# EAGLE board carte_bouton (EAGLE 6.5.0)
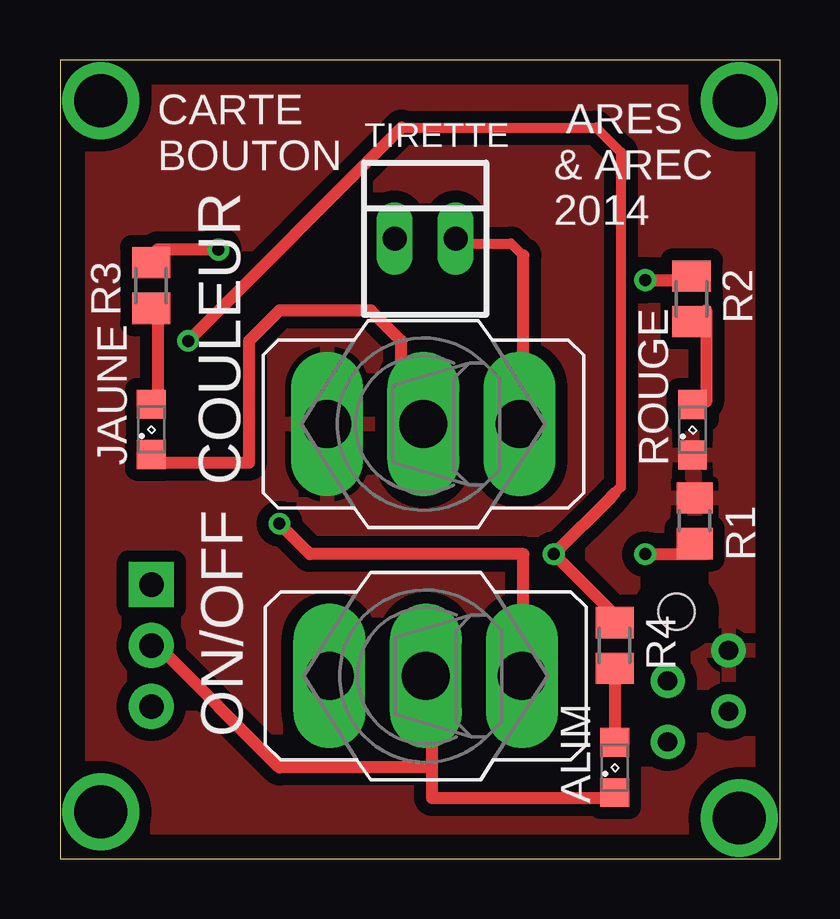
[diagram p0: board, top side]
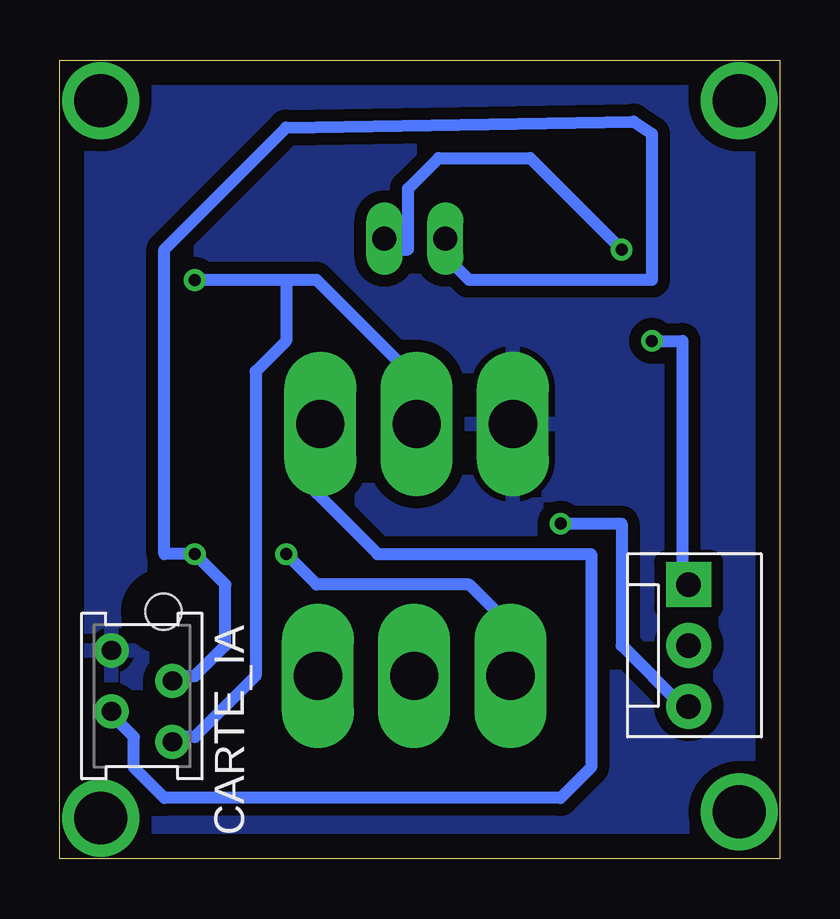
[diagram p1: board, bottom side, seen from below]

Size 30 x 33.3 mm. Coordinates in mm from the lower left corner, seen from the top.
Outline: 0,0 30,0 30,33.3 0,33.3 0,0
Copper layers (1*16): Top 0.1mm / dielectric 1.5mm / Bottom 0.1mm
Design rules "ensea": minimum track width 0.5mm, minimum drill 0.5mm, track to track 0.5mm, track to pad 0.5mm, pad to pad 0.5mm, via to via 0.5mm, smd to smd 8mil, copper to edge 40mil, drill to drill 8mil, minimum pad ring 10mil, minimum via ring 8mil, stop-mask expansion 4mil, vias tented up to drill 0mil, thermal gap 10mil

## Footprints (pad centres in the part's own frame; a part is rotated, then mirrored left to right if it is on the bottom)
SML0805 = smd 1.2 x 1.2: A 1.05,0; C -1.05,0
MOLEX-1X3 = drill 1.016 pad 1.88 square: 1 0,0 | drill 1.016 pad 1.88: 2 2.54,0; 3 5.08,0
AMP-215079-4 = drill 0.8 pad 1.422: 1 0,0; 2 1.27,2.54; 3 2.54,0; 4 3.81,2.54 | hole 1.5: -1.62,2.175
320-916 = drill 2.007 long: 1 0,4.013; 2 0,0; 3 0,-4.013
R0805 = smd 1.3 x 1.5: 1 -0.95,0; 2 0.95,0
M0805 = smd 1.3 x 1.6: 1 -0.95,0; 2 0.95,0
22-23-2021 = drill 1 long: 1 -1.27,0; 2 1.27,0

## Placement (x,y rotation side)
ALIM  [SML0805]  23.11,3.81 90 top
CARTE_ALIM  [MOLEX-1X3]  3.81,11.43 270 bottom
CARTE_IA  MMATCH-4-  [AMP-215079-4]  27.86,8.69 270 bottom
COULEUR  [320-916]  15.14,18.12 90 top
JAUNE  [SML0805]  3.8,17.9 90 top
ON/OFF  [320-916]  15.24,7.62 90 top
R1  [R0805]  26.44,14.09 270 top
R2  1k  [M0805]  26.32,23.34 270 top
R3  1k  [M0805]  3.8,23.9 90 top
R4  1k  [M0805]  23.11,8.89 270 top
ROUGE  [SML0805]  26.35,17.88 90 top
TIRETTE  22-23-2021  [22-23-2021]  15.21,25.85 0 top

## Library data of the parts
ALIM JAUNE ROUGE = led
CARTE_ALIM = SparkFun-Connectors
CARTE_IA = jt-con-micromatch
COULEUR ON/OFF = switch
R1-R4 = rcl
TIRETTE = con-molex; MF: MOLEX; MPN: 22-23-2021; OC_FARNELL: 1462926; OC_NEWARK: 25C3832

## Nets
5V: CARTE_ALIM.3 ON/OFF.3
+3V3: CARTE_IA.3 COULEUR.3 R3.2 TIRETTE.2
DATA_SWITCH: ALIM.C CARTE_ALIM.2 ON/OFF.2
GND: CARTE_IA.1 COULEUR.1 R1.1 ROUGE.C
GND_DIRTY: CARTE_ALIM.1 ON/OFF.1 R4.1
N$1: CARTE_IA.4 COULEUR.2 JAUNE.C R2.1
N$2: R2.2 ROUGE.A
N$3: JAUNE.A R3.1
N$9: ALIM.A R4.2
TIRETTE: CARTE_IA.2 R1.2 TIRETTE.1

## Tracks (layer width: path | path; a pad name or v marks a point on that pad's centre or on a via)
5V  (via drill 0.5)
  Top 0.5: v9.14,13.97 10.41,12.7 19.3,12.7 19.3,7.62 ON/OFF.3
  Bottom 0.5: v9.14,13.97 6.6,13.97 6.6,8.89 4.06,6.35 CARTE_ALIM.3
+3V3  (via drill 0.5)
  Top 0.406: 16.51,25.65 18.8,25.65 19.3,25.15
  Top 0.5: v6.6,25.4 4.06,25.4 R3.2 | 19.3,25.15 19.3,19.05 COULEUR.3 | 16.51,25.65 TIRETTE.2
  Bottom 0.5: v6.6,25.4 10.41,29.21 14.22,29.21 15.49,27.94 15.49,25.4 16.76,25.4 TIRETTE.2 | CARTE_IA.3 28.19,6.35 26.92,5.08 26.92,3.81 25.65,2.54 9.14,2.54 7.87,3.81 7.87,12.7 16.76,12.7 19.3,15.24 19.3,17.78 COULEUR.3
DATA_SWITCH
  Top 0.5: 15.49,3.81 15.49,7.62 ON/OFF.2 | 15.49,3.81 15.49,2.54 23.11,2.54 ALIM.C | 15.49,3.81 9.14,3.81 4.06,8.89 CARTE_ALIM.2
GND
  pour Top (isolate 0.4): -0.15,-12.95 31.02,-10.92 30,33.3 0.1,33.3
  pour Bottom (isolate 0.4): -0.15,-12.95 31.02,-10.67 30.25,33.05 0.1,33.3
GND_DIRTY  (via drill 0.5)
  Top 0.406: 14.22,30.48 22.35,30.48 23.37,29.46 23.37,15.49 22.99,15.11
  Top 0.5: R4.1 23.11,10.16 v20.57,12.7 22.99,15.11 23.11,15.24 | 14.22,30.48 v5.33,21.59
  Bottom 0.5: v20.57,12.7 19.3,11.43 12.95,11.43 11.68,10.16 11.68,7.62 ON/OFF.1 | v5.33,21.59 4.06,21.59 4.06,11.43 CARTE_ALIM.1
N$1  (via drill 0.5)
  Top 0.5: JAUNE.C 4.06,16.51 7.87,16.51 7.87,21.59 9.14,22.86 12.95,22.86 14.22,21.59 14.22,19.05 COULEUR.2 | v24.38,24.13 25.65,24.13 R2.1
  Bottom 0.5: 20.57,24.13 19.3,24.13 14.22,19.05 COULEUR.2 | 20.57,24.13 v24.38,24.13 | 20.57,24.13 20.57,21.59 21.84,20.32 21.84,7.62 24.38,5.08 25.65,5.08 CARTE_IA.4
N$2
  Top 0.5: ROUGE.A 26.92,19.05 26.92,22.86 R2.2
N$3
  Top 0.5: JAUNE.A 4.06,19.05 4.06,22.86 R3.1
N$4  (via drill 2.2 pad 2.54)
  other vias: 1.7,31.6
N$5  (via drill 2.2 pad 2.54)
  other vias: 28.3,31.6
N$6  (via drill 2.2 pad 2.54)
  other vias: 28.3,1.7
N$7  (via drill 2.2 pad 2.54)
  other vias: 1.7,1.95
N$9
  Top 0.5: R4.2 ALIM.A
TIRETTE  (via drill 0.5)
  Top 0.5: v24.38,12.7 26.92,12.7 R1.2
  Bottom 0.5: CARTE_IA.2 25.65,7.62 24.38,7.62 23.11,8.89 23.11,11.43 v24.38,12.7 25.65,12.7 25.65,25.4 20.57,30.48 6.1,30.73 5.33,30.23 5.33,24.13 12.95,24.13 14.22,25.4 TIRETTE.1

## Text on the board
tPlace: CARTE / BOUTON
tNames: ARES / & AREC / 2014